# Altium PCB Печтаная плата.PcbDoc
Units mm, origin at the board's own origin, x right, y up, seen from the top; angles counter-clockwise.
Board outline 140 x 100 mm, 4 copper layers ([1]Top, [2]MWGND, [3]Signal, [4]Power), stack 1.271 mm thick; 36 components, 19 nets, 146 pads, 816 vias.
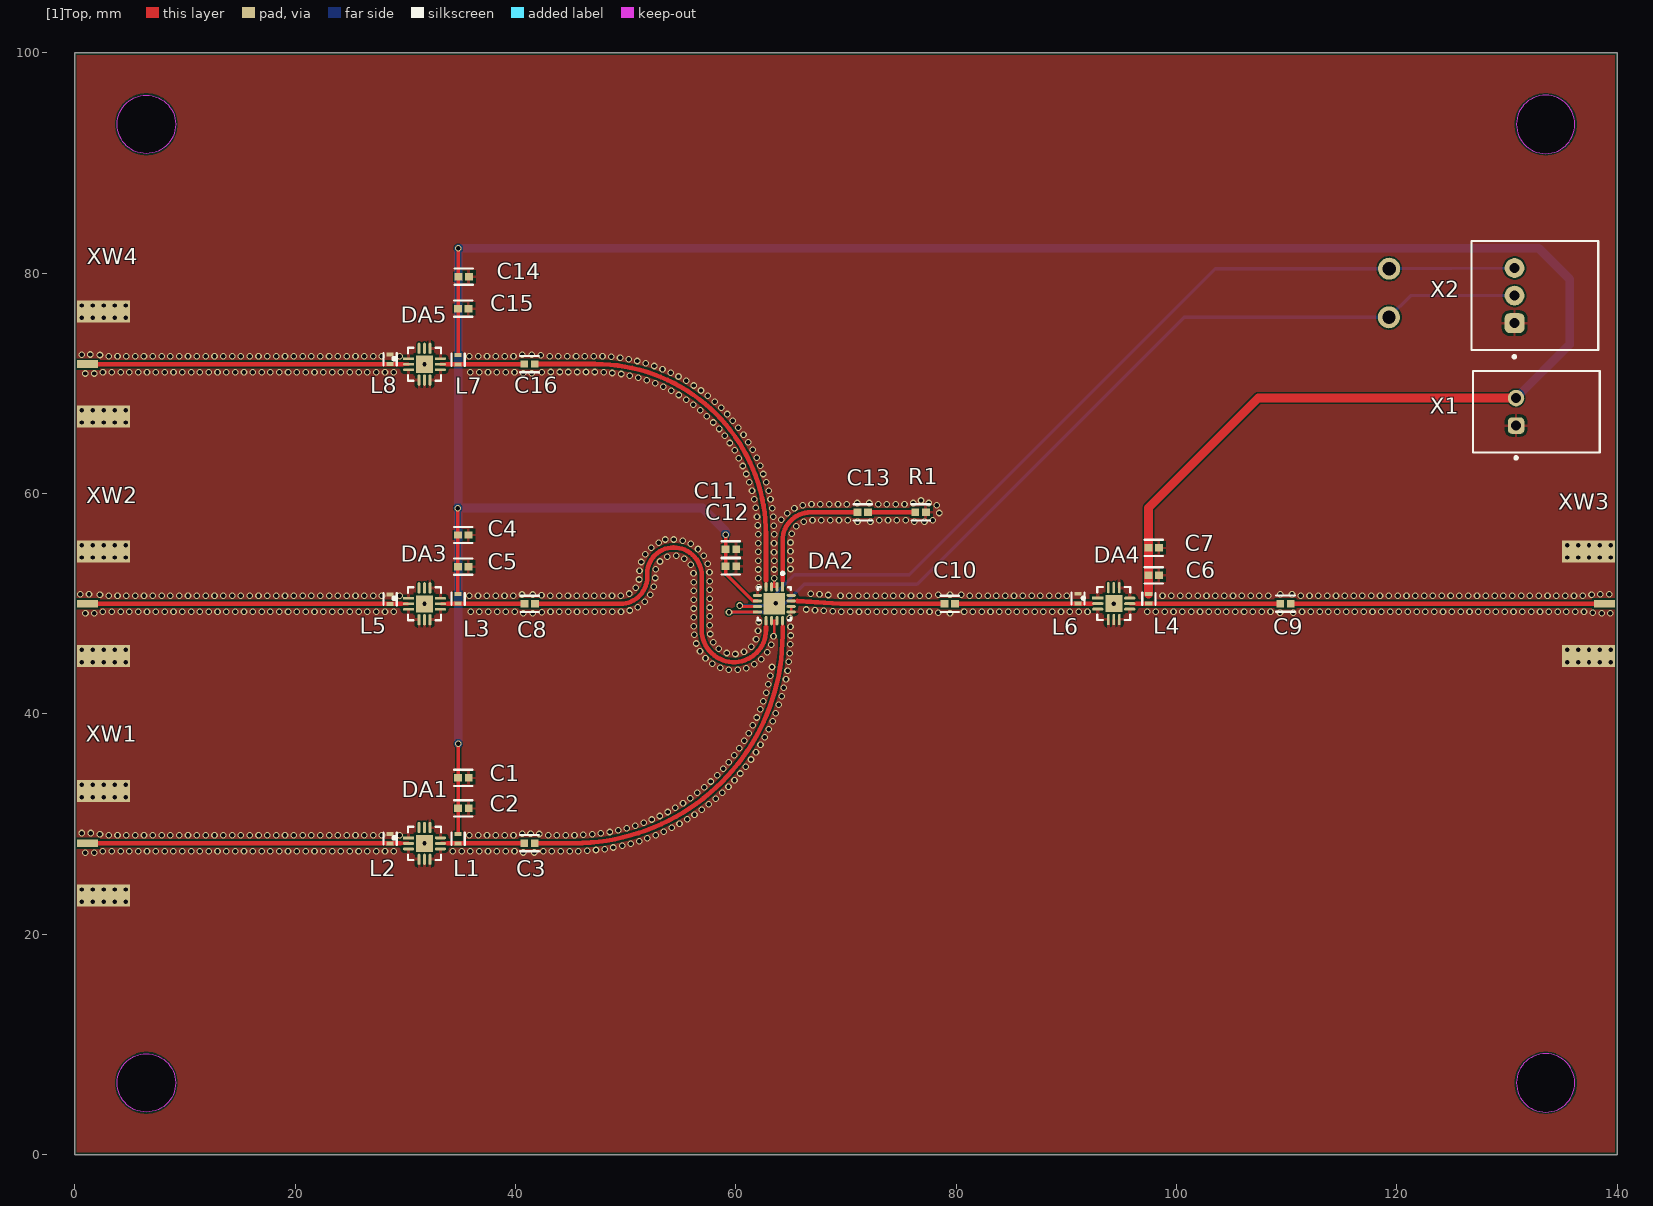
[diagram p0: [1]Top view]
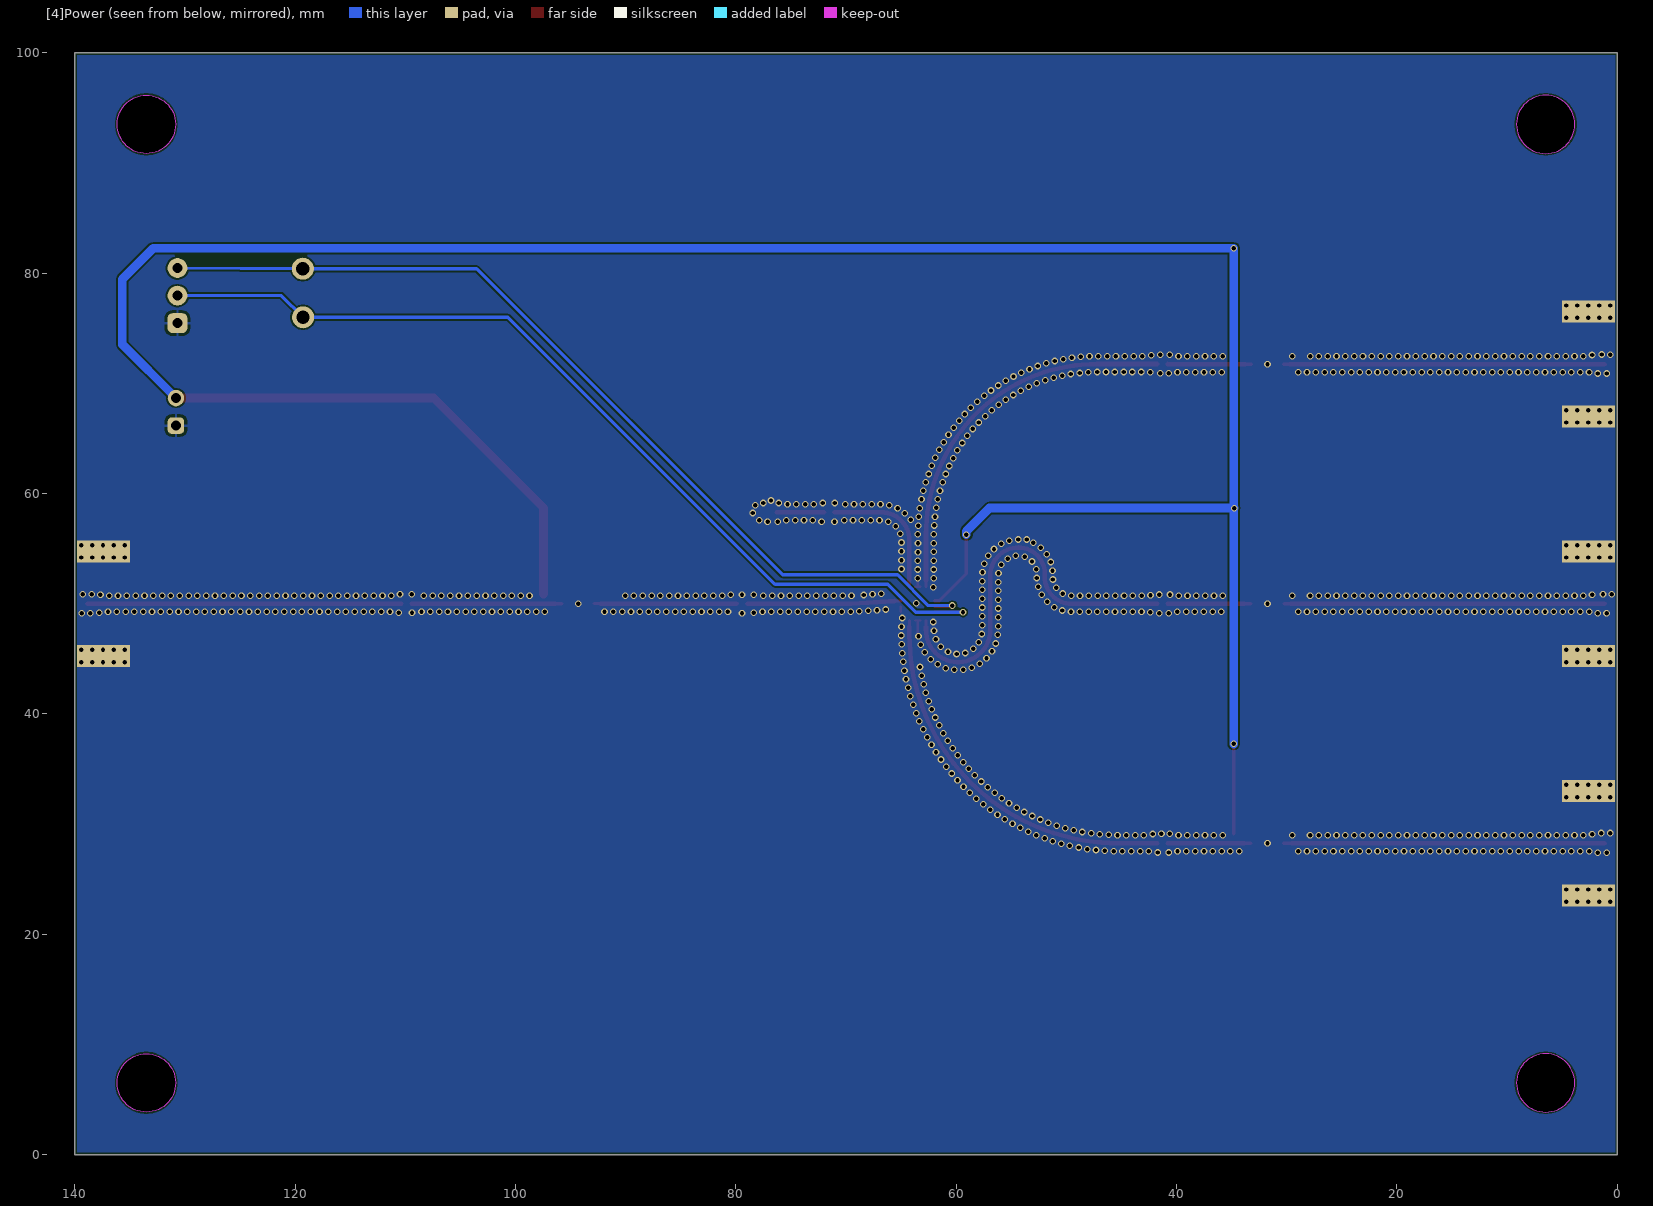
[diagram p1: [4]Power view, seen from below]
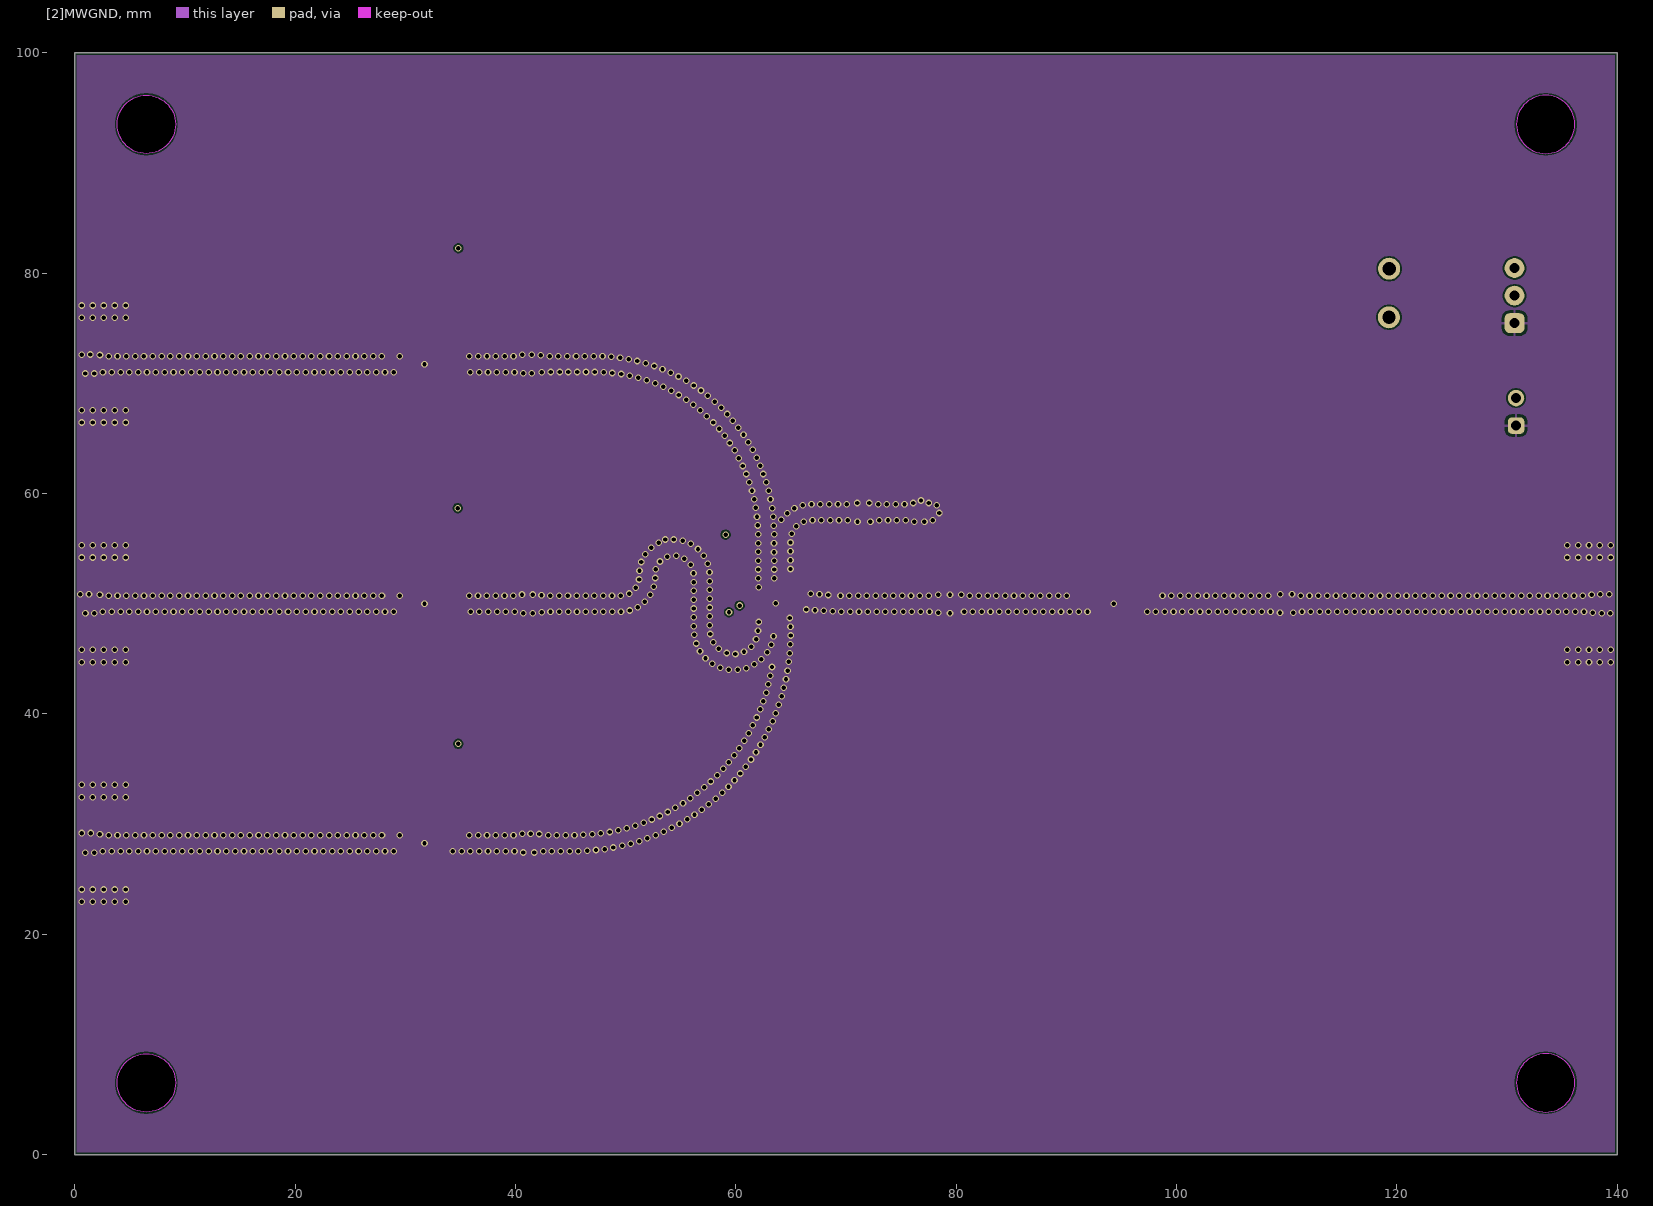
[diagram p2: [2]MWGND]
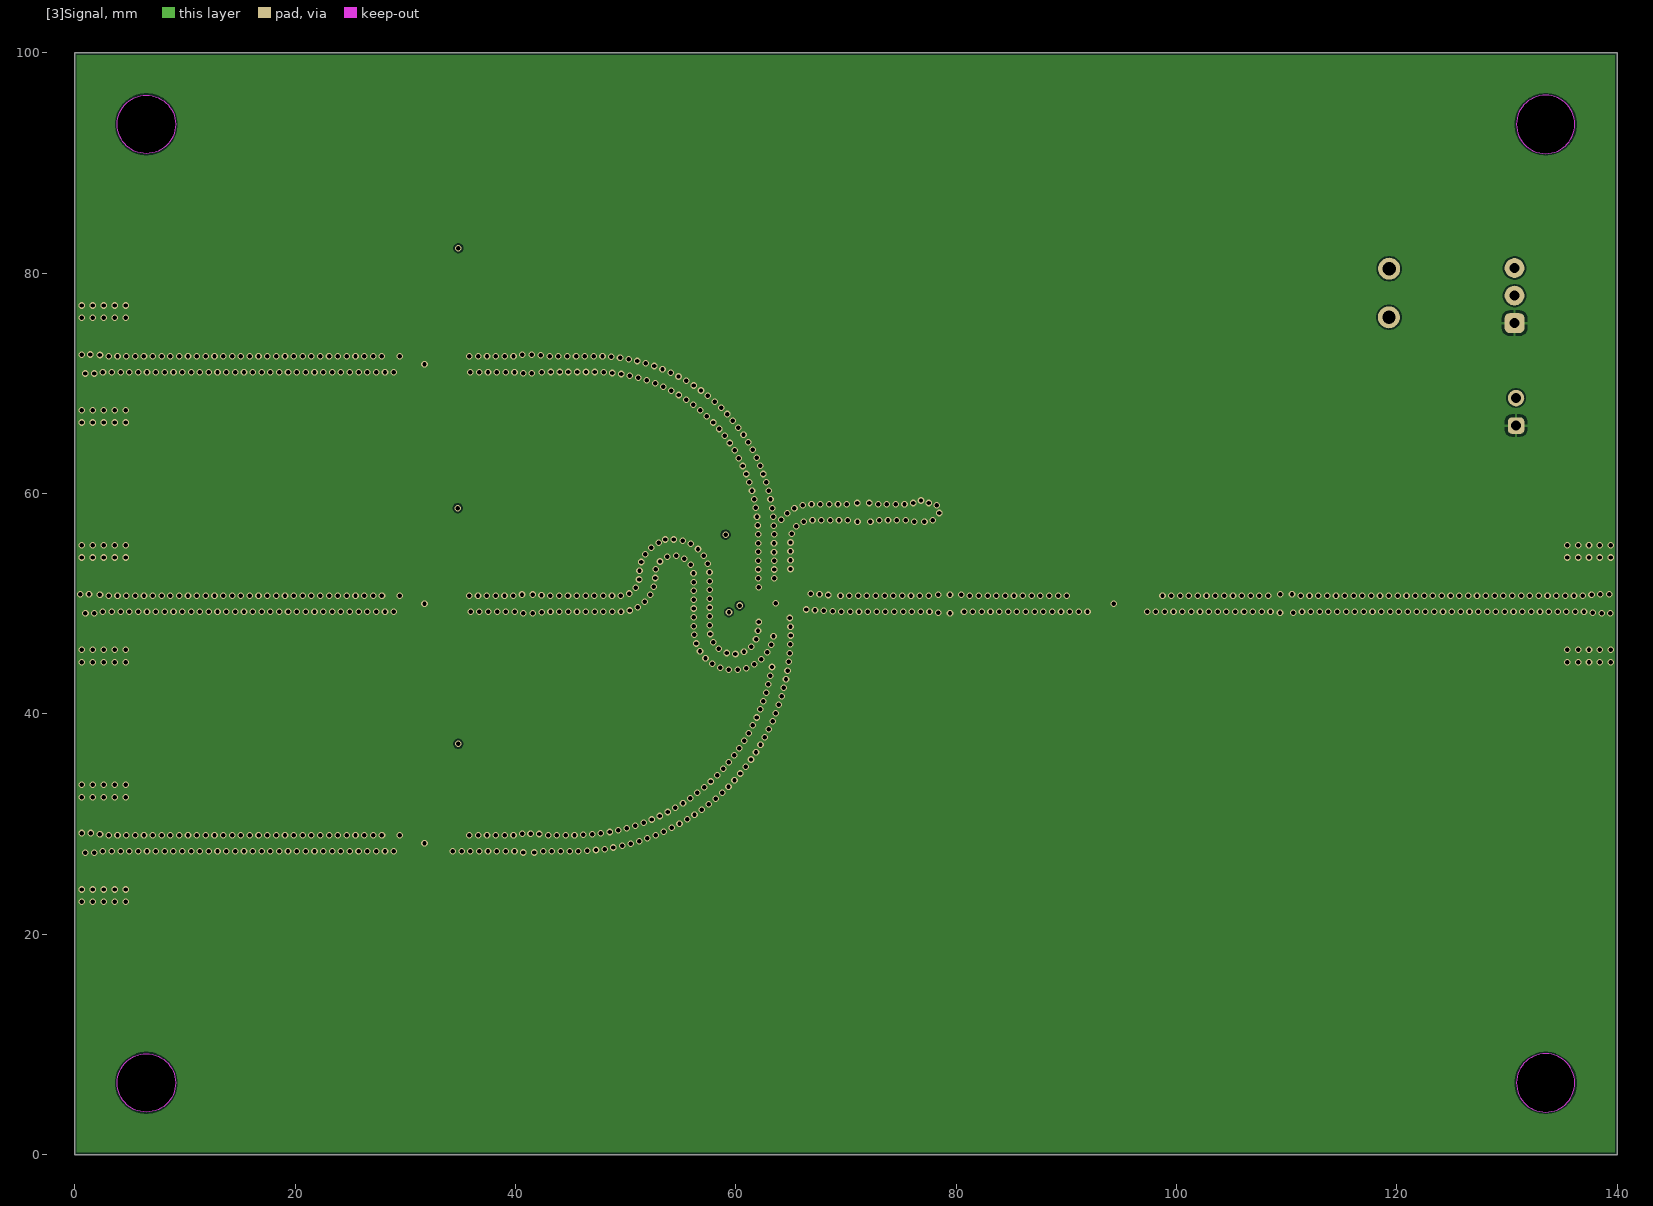
[diagram p3: [3]Signal]
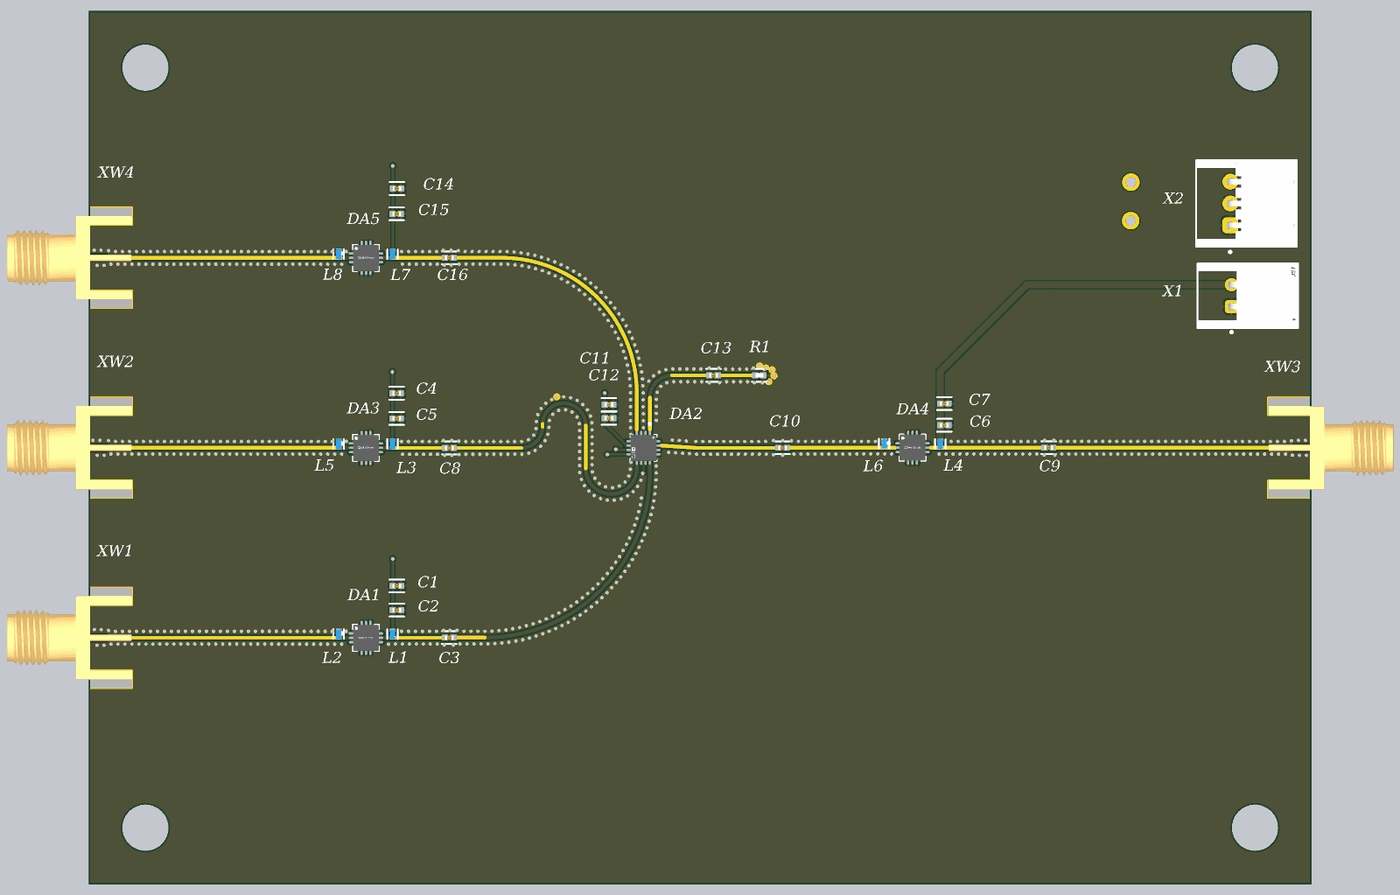
[diagram p4: 3D render of the assembled board from above, using the file's embedded part models]

## Layer stack, top to bottom
Top Solder: solder mask 0.0102, Solder Resist, Dk 3.5
[1]Top: signal copper 0.018
RO4003C: core 0.2032, Core-026, Dk 3.38
[2]MWGND: signal copper 0.018
Dielectric 1: prepreg 0.2083, PP-022, Dk 4.5
[3]Signal: signal copper 0.018
FR-4: core 0.7874, Core-040, Dk 4.6
[4]Power: signal copper 0.018
Bottom Solder: solder mask 0.0102, Solder Resist, Dk 3.5

## Board outline
0.006,0.006 140.006,0.006 140.006,100.006 0.006,100.006
cut-out: 6.506,3.856 cw(c6.506,6.506) 3.856,6.506 cw(c6.506,6.506) 6.506,9.156 cw(c6.506,6.506) 9.156,6.506 cw(c6.506,6.506)
cut-out: 130.856,6.506 ccw(c133.506,6.506) 133.506,3.856 ccw(c133.506,6.506) 136.156,6.506 ccw(c133.506,6.506) 133.506,9.156 ccw(c133.506,6.506)
cut-out: 130.856,93.506 ccw(c133.506,93.506) 133.506,90.856 ccw(c133.506,93.506) 136.156,93.506 ccw(c133.506,93.506) 133.506,96.156 ccw(c133.506,93.506)
cut-out: 6.506,90.856 cw(c6.506,93.506) 3.856,93.506 cw(c6.506,93.506) 6.506,96.156 cw(c6.506,93.506) 9.156,93.506 cw(c6.506,93.506)

## Design rules (kind name [scope] priority, off if disabled: settings)
Clearance CPWG_1 [InNetClass('RF') vs InNet('GND')] p1: gap=0.2 ignorepadtopadclearanceinfootprint=FALSE except(0.15: Arc-SMDPad Track-SMDPad SMDPad-SMDPad)
Clearance [All] p2: gap=0.15 ignorepadtopadclearanceinfootprint=FALSE
MatchedLengths lia_zochem_ti_umer [InNetClass('RF')] p1: tolerance=1 checknetsindiffpair=TRUE checkdiffpairvsdiffpair=FALSE checkxsignals=FALSE checkothers=FALSE
MinimumSolderMaskSliver [All] p1: minsoldermaskwidth=0.15
PolygonConnect RF_COMPONENTS [(HasFootprint('S-P2152-19CQA') OR HasFootprint('FP-0402HP-MFG')) vs InNet('GND')] p1: connectstyle=Direct reliefconductorwidth=0.254 reliefentries=4 polygonreliefangle="90 Angle" airgapwidth=0.15
PolygonConnect [All] p2: thpad.connectstyle=Relief thpad.reliefconductorwidth=0.254 thpad.reliefentries=4 thpad.polygonreliefangle="90 Angle" thpad.airgapwidth=0.254 smdpad.connectstyle=Relief smdpad.reliefconductorwidth=0.254 smdpad.reliefentries=4 smdpad.polygonreliefangle="90 Angle" smdpad.airgapwidth=0.254 via.connectstyle=Direct via.reliefconductorwidth=0.254 via.reliefentries=4 via.polygonreliefangle="90 Angle" via.airgapwidth=0.254
RoutingVias [All] p1: holewidth=0.4 width=0.6 viastyle="Through Hole" minholewidth=0.3 minwidth=0.5 maxholewidth=0.711 maxwidth=1
SolderMaskExpansion CPWG [InNetClass('RF')] p1: expansion=1 istentingtop=FALSE
SolderMaskExpansion [All] p2: expansion=0.102 istentingtop=FALSE
SupplyNets "Schematic Supply Nets_1" [InNet('+5')] p1: voltage=0.000
SupplyNets "Schematic Supply Nets" [InNet('GND')] p2: voltage=0.000
Width micro_strip [InNetClass('RF')] p1: maxlimit=0.5 minlimit=0.254 preferedwidth=0.254 toplayer_minwidth=0.418 toplayer_maxwidth=0.418 toplayer_prefwidth=0.418 impedanceprofiledriven=TRUE impedanceprofileid={426BE0D7-A08D-4F41-A99D-DD10C29EF04F} impedanceprofilevalue=50.000000 minimp=50.000000 maximp=50.000000 favimp=50.000000 checkconnectedcopper=TRUE
Width [All] p2: maxlimit=0.8 minlimit=0.2 preferedwidth=0.3
29 further rules are at their usual default settings.

## Classes and differential pairs
net class RF_SAME: NetC3_1 NetC8_1 NetC16_1
net class RF: NetC3_1 NetC3_2 NetC8_1 NetC8_2 NetC9_1 NetC9_2 NetC10_1 NetC10_2 NetC13_1 NetC13_2 NetC16_1 NetC16_2 NetDA1_2 NetDA3_2 NetDA5_2
component class AMP4: DA4 XW3
component class AMP3: DA5 XW4
component class AMP2: DA3 XW2
component class AMP1: DA1 XW1

## Components (designator, comment, footprint, x,y, rotation, side; value= is the part's Value field where it differs from the comment)
C1 "10pF" FP-GJM155-0_05-IPC_A 35.285,34.186 r0 top
C2 "10nF" FP-GJM155-0_05-IPC_A 35.285,31.417 r0 top
C3 "100 pF" FP-GJM155-0_05-IPC_A 41.279,28.268 r180 top
C4 "10pF" FP-GJM155-0_05-IPC_A 35.259,56.233 r0 top
C5 "10nF" FP-GJM155-0_05-IPC_A 35.259,53.363 r0 top
C6 "10pF" FP-GJM155-0_05-IPC_A 97.942,52.576 r0 top
C7 "10nF" FP-GJM155-0_05-IPC_A 97.942,55.065 r0 top
C8 "100pF" FP-GJM155-0_05-IPC_A 41.296,49.985 r180 top
C9 "100pF" FP-GJM155-0_05-IPC_A 109.894,50.01 r180 top
C10 "100pF" FP-GJM155-0_05-IPC_A 79.426,49.995 r180 top
C11 "10 nF" FP-GJM155-0_05-IPC_A 59.563,54.938 r180 top
C12 "10 pF" FP-GJM155-0_05-IPC_A 59.563,53.388 r180 top
C13 "100pF" FP-GJM155-0_05-IPC_A 71.526,58.291 r180 top
C14 "10pF" FP-GJM155-0_05-IPC_A 35.302,79.677 r0 top
C15 "10nF" FP-GJM155-0_05-IPC_A 35.259,76.782 r0 top
C16 "100pF" FP-GJM155-0_05-IPC_A 41.279,71.753 r180 top
DA1 "PMA3-83LN+" FP-DQ1225-IPC_A 31.751,28.25 r0 top
DA2 "HMC7992" FP-CP-16-38-IPC_A 63.5,50 r270 top
DA3 "PMA3-83LN+" FP-DQ1225-IPC_A 31.751,49.993 r0 top
DA4 "PMA3-83LN+" FP-DQ1225-IPC_A 94.311,50.01 r0 top
DA5 "PMA3-83LN+" FP-DQ1225-IPC_A 31.751,71.735 r0 top
L1 "39 nH" FP-0402HP-MFG 34.798,28.671 r90 top
L2 "18nH" FP-0402HP-MFG 28.626,28.677 r270 top
L3 "39nH" FP-0402HP-MFG 34.798,50.439 r90 top
L4 "39nH" FP-0402HP-MFG 97.485,50.442 r90 top
L5 "18nF" FP-0402HP-MFG 28.626,50.417 r270 top
L6 "18nH" FP-0402HP-MFG 91.059,50.47 r270 top
L7 "39nH" FP-0402HP-MFG 34.798,72.156 r90 top
L8 "18nH" FP-0402HP-MFG 28.626,72.181 r270 top
R1 "100" FP-CR0402-IPC_A 76.775,58.291 r180 top
X1 "JST-2P" FP-S2B-XH-A-1_LF_SN-MFG 132.67,67.415 r270 top
X2 "JST-3P" FP-S3B-XH-A-1_LF_SN-MFG 132.535,77.965 r270 top
XW1 "SMA" S-P2152-19CQA 2.6,33 r180 top
XW2 "SMA" S-P2152-19CQA 2.6,54.75 r180 top
XW3 "SMA" S-P2152-19CQA 137.4,45.25 r0 top
XW4 "SMA" S-P2152-19CQA 2.6,76.5 r180 top

## Footprints (in the part's own frame and the unit in brackets; to place one, negate y for a bottom-side part, rotate by r counter-clockwise, add the part's x,y. Pads: shape width x height; smd on the part's side, far side on the other; paste and mask are expansions set on the pad)
FP-0402HP-MFG [mm]
  rect 0.36x0.66 smd paste+0 mask+0: 1(-0.435,0) 2(0.435,0)
  silkscreen extent -0.56,-0.6 0.55,0.6, body extent -0.71,-0.46 0.71,0.46, height 0.25
FP-CP-16-38-IPC_A [mm]
  rect 0.846x0.242 smd paste+0 mask+0: 1(-1.533,0.75)
  rrect100% 0.846x0.242 smd paste+0 mask+0: 2(-1.533,0.25) 3(-1.533,-0.25) 4(-1.533,-0.75) 9(1.533,-0.75) 10(1.533,-0.25) 11(1.533,0.25) 12(1.533,0.75)
  rrect100% 0.242x0.846 smd paste+0 mask+0: 5(-0.75,-1.533) 6(-0.25,-1.533) 7(0.25,-1.533) 8(0.75,-1.533) 13(0.75,1.533) 14(0.25,1.533) 15(-0.25,1.533) 16(-0.75,1.533)
  rect 1.92x1.92 smd paste-1000 mask+0: 17(0,0)
  silkscreen extent -2.88,-1.5 1.5,1.5, body extent -2.46,-2.46 2.46,2.46, height 0.25
FP-CR0402-IPC_A [mm]
  rect 0.715x0.672 smd paste+0 mask+0: 1(-0.479,0) 2(0.479,0)
  silkscreen extent -0.84,-0.74 0.84,0.74, body extent -1.04,-0.54 1.04,0.54, height 0.25
FP-DQ1225-IPC_A [mm]
  rect 1.019x0.262 smd paste+0 mask+0: 1(-1.447,0.5)
  rrect100% 1.019x0.262 smd paste+0 mask+0: 2(-1.447,0) 3(-1.447,-0.5) 7(1.447,-0.5) 8(1.447,0) 9(1.447,0.5)
  rrect100% 0.262x1.019 smd paste+0 mask+0: 4(-0.5,-1.447) 5(0,-1.447) 6(0.5,-1.447) 10(0.5,1.447) 11(0,1.447) 12(-0.5,1.447)
  rect 1.549x1.549 smd paste-1000 mask+0: 13(0,0)
  silkscreen extent -2.88,-1.5 1.5,1.5, body extent -2.46,-2.46 2.46,2.46, height 0.25
FP-GJM155-0_05-IPC_A [mm]
  rect 0.715x0.672 smd paste+0 mask+0: 1(-0.479,0) 2(0.479,0)
  silkscreen extent -0.84,-0.74 0.84,0.74, body extent -1.04,-0.54 1.04,0.54, height 0.25
FP-S2B-XH-A-1_LF_SN-MFG [mm]
  rrect50% 1.5x1.5 hole 0.9 paste-2539.97 mask+0: 1(1.25,-1.85)
  round 1.5 hole 0.9 paste-2539.97 mask+0: 2(-1.25,-1.85)
  silkscreen extent -3.7,-5.75 4.3,5.75, body extent -3.8,-5.85 3.8,5.85, height 0.25
FP-S3B-XH-A-1_LF_SN-MFG [mm]
  rrect50% 1.8x1.8 hole 0.9 paste-2539.97 mask+0: 1(2.5,-1.85)
  round 1.8 hole 0.9 paste-2539.97 mask+0: 2(0,-1.85) 3(-2.5,-1.85)
  silkscreen extent -4.95,-5.75 5.67,5.75, body extent -5.05,-5.85 5.05,5.85, height 0.25
S-P2152-19CQA [mm]
  rect 1.9x0.7 smd: 1(1.45,4.75)
  rect 4.8x2 smd: 2(0,9.5) 2(0,0)
  rect 4.8x2 smd far side: 2(0,9.5) 2(0,0)
  body extent -2.34,-0.02 11.94,9.51, height 4.8

## Part data
C1 C2 C3 C4 C5 C6 C7 C8 C9 C10 C11 C12 C13 C14 C15 C16: library part C
L1 L2 L3 L4 L5 L6 L7 L8: library part L
R1: library part R
X1 X2: "JST type connector", Net1=GND
  X1: Net2=+5V
  X2: Net2=A, Net3=B
DA1 XW1: ClassName=AMP1
DA3 XW2: ClassName=AMP2
DA4 XW3: ClassName=AMP4
DA5 XW4: ClassName=AMP3

## Free pads (board coordinates)
  round 2 hole 1.2 paste-2539.97 mask+0: MH5(119.305,80.405) MH6(119.28,75.995)

## Via types
v1: diameter 0.6, hole 0.4, [1]Top to [4]Power, 810 vias
v2: diameter 0.6, hole 0.4, [1]Top to [4]Power, tented both sides, 6 vias

## Nets (pads, with @x,y where several pads share a name; then routed paths per layer and width w, separated by ;. In a path a pad name is that pad's centre, name@x,y a point inside that pad or via, vN(x,y) a via of type N, cw(c..) or ccw(c..) an arc to the next point about the centre after c; other vN are vias at no path point)
+5: C1.1 C2.1 C4.1 C5.1 C6.1 C7.1 C11.2 C12.2 C14.1 C15.1 DA2.6 L1.2 L3.2 L4.2 L7.2 X1.2 | length 263.8
  [1]Top w0.3: v2(34.765,58.675) 34.782,58.659 34.782,50.89 L3.2 ; L1.2 34.807,29.115 34.807,37.267 v2(34.815,37.275) ; L7.2 34.811,72.603 34.811,82.247 v2(34.823,82.26) ; v2(59.084,56.268) C12.2 59.084,52.735 61.541,50.279 61.938,50.279 DA2.6 ; C7.1 C7.1@97.475,55.054 ; L4.2@97.475,50.888 L4.2
  [1]Top w0.8: C7.1 97.464,58.709 107.42,68.665 X1.2 ; L4.2@97.475,50.888 C7.1@97.475,55.054
  [4]Power w0.8: v2(34.765,58.675) v2@34.819,58.675 ; v2(34.815,37.275) 34.819,37.279 v2@34.819,58.675 ; v2(59.084,56.268) 59.084,56.581 56.99,58.675 v2@34.819,58.675 ; X1.2 135.695,73.54 135.695,79.445 132.88,82.26 v2(34.823,82.26) 34.819,82.256 v2@34.819,58.675
A: DA2.8 pad.MH6 X2.2 | length 85.8
  [1]Top w0.254: v2(59.385,49.223) 59.407,49.244 61.961,49.244 DA2.8
  [4]Power w0.3: v2(59.385,49.223) 63.679,49.223 66.221,51.765 76.455,51.765 100.685,75.995 pad.MH6 121.25,77.965 X2.2
B: DA2.7 pad.MH5 X2.3 | length 84.6
  [1]Top w0.254: v2(60.35,49.832) 60.444,49.832 60.526,49.75 DA2.7
  [4]Power w0.3: v2(60.35,49.832) 62.534,49.832 65.327,52.625 75.76,52.625 103.54,80.405 pad.MH5 X2.3
GND: C1.2 C2.2 C4.2 C5.2 C6.2 C7.2 C11.1 C12.1 C14.2 C15.2 DA1.1 DA1.3 DA1.4 DA1.5 DA1.6 DA1.7 DA1.9 DA1.10 DA1.13 DA2.2 DA2.3 DA2.5 DA2.10 DA2.11 DA2.13 DA2.14 DA2.16 DA2.17 DA3.1 DA3.3 DA3.4 DA3.5 DA3.6 DA3.7 DA3.9 DA3.10 DA3.13 DA4.1 DA4.3 DA4.4 DA4.5 DA4.6 DA4.7 DA4.9 DA4.10 DA4.13 DA5.1 DA5.3 DA5.4 DA5.5 DA5.6 DA5.7 DA5.9 DA5.10 DA5.13 L2.1 L5.1 L6.1 L8.1 R1.1 X1.1 X2.1 XW1.2 XW2.2 XW3.2 XW4.2 | length 3.7
  [1]Top w0.2: DA2.10 63.5,48.467 ; DA2.3 63.5,51.533 ; v1(63.43,47.058) 63.5,47.128 63.5,48.467 ; v1(63.5,52.304) 63.5,51.533 ; DA2.11 63.5,48.467 ; DA2.2 63.5,51.533 ; DA2.13 DA2.14
  other v1: 0.66,22.946 1.651,22.946 2.642,22.946 3.632,22.946 4.623,22.946 0.66,24.064 1.651,24.064 2.642,24.064 3.632,24.064 4.623,24.064 0.977,27.39 1.777,27.39 40.71,27.422 41.727,27.422 2.565,27.528 3.365,27.528 4.165,27.528 4.965,27.528 5.765,27.528 6.565,27.528 7.365,27.528 8.165,27.528 8.965,27.528 9.765,27.528 10.565,27.528 11.365,27.528 12.165,27.528 12.965,27.528 13.765,27.528 14.565,27.528 15.365,27.528 16.165,27.528 16.965,27.528 17.765,27.528 18.565,27.528 19.365,27.528 20.165,27.528 20.965,27.528 21.765,27.528 22.565,27.528 23.365,27.528 24.165,27.528 24.965,27.528 25.765,27.528 26.565,27.528 27.365,27.528 28.165,27.528 28.965,27.527 34.318,27.527 35.118,27.536 35.918,27.536 36.718,27.536 37.518,27.536 38.318,27.536 39.118,27.536 39.918,27.536 42.517,27.545 43.317,27.545 44.117,27.545 44.917,27.545 45.717,27.55 46.517,27.578 47.314,27.647 48.109,27.732 48.897,27.872 49.682,28.025 50.457,28.223 31.751,28.25 51.225,28.446 51.985,28.698 3.089,28.974 3.889,28.974 4.689,28.974 5.489,28.974 6.289,28.974 7.089,28.974 7.889,28.974 8.689,28.974 9.489,28.974 10.289,28.974 11.089,28.974 11.889,28.974 12.689,28.974 13.489,28.974 14.289,28.974 15.089,28.974 15.889,28.974 16.689,28.974 17.489,28.974 18.289,28.974 19.089,28.974 19.889,28.974 20.689,28.974 21.489,28.974 22.289,28.974 23.089,28.974 23.889,28.974 24.689,28.974 25.489,28.974 26.289,28.974 27.089,28.974 27.889,28.974 29.489,28.973 35.825,28.982 36.625,28.982 37.425,28.982 38.225,28.982 39.025,28.982 39.825,28.982 42.968,28.991 43.768,28.991 44.568,28.991 45.368,28.988 52.73,28.989 46.168,29.017 46.966,29.068 2.295,29.071 40.615,29.114 41.376,29.109 42.176,29.102 47.761,29.154 0.66,29.185 1.448,29.185 48.551,29.283 53.469,29.295 49.336,29.434 50.112,29.632 54.186,29.65 50.879,29.859 54.896,30.018 51.638,30.111 52.379,30.413 55.584,30.427 53.111,30.734 56.259,30.857 53.827,31.092 56.916,31.313 54.524,31.484 57.549,31.801 55.211,31.895 58.172,32.303 55.868,32.351 0.66,32.446 1.651,32.446 2.642,32.446 3.632,32.446 4.623,32.446 56.511,32.827 58.76,32.846 57.134,33.329 59.338,33.399 0.66,33.564 1.651,33.564 2.642,33.564 3.632,33.564 4.623,33.564 57.727,33.866 59.883,33.985 58.305,34.418 60.409,34.587 58.85,35.004 60.911,35.21 59.372,35.611 61.382,35.857 59.874,36.234 61.838,36.514 60.333,36.889 62.249,37.2 60.774,37.556 62.648,37.894 61.182,38.244 63.006,38.609 61.556,38.952 63.342,39.336 61.91,39.669 63.648,40.075 62.216,40.408 63.917,40.828 62.498,41.157 64.17,41.587 62.751,41.916 64.371,42.361 62.958,42.688 64.559,43.139 63.144,43.466 64.701,43.926 59.377,44.005 60.177,43.996 60.96,44.156 58.599,44.191 63.287,44.254 61.688,44.49 57.882,44.546 0.66,44.696 1.651,44.696 2.642,44.696 3.632,44.696 4.623,44.696 135.459,44.696 136.45,44.696 137.44,44.696 138.431,44.696 139.422,44.696 64.819,44.717 62.329,44.968 57.255,45.044 59.973,45.435 59.178,45.525 64.904,45.513 62.847,45.578 60.749,45.631 56.758,45.67 0.66,45.814 1.651,45.814 2.642,45.814 3.632,45.814 4.623,45.814 135.459,45.814 136.45,45.814 137.44,45.814 138.431,45.814 139.422,45.814 58.472,45.902 61.403,46.091 63.217,46.287 64.951,46.312 56.403,46.387 57.947,46.505 61.843,46.759 64.979,47.111 56.217,47.165 57.668,47.255 62.019,47.54 64.973,47.911 56.189,47.965 57.634,48.054 62.077,48.337 64.891,48.707 56.189,48.765 57.634,48.854 0.978,49.14 1.778,49.14 40.728,49.139 41.593,49.139 79.446,49.149 138.582,49.14 139.382,49.14 109.394,49.164 110.6,49.164 137.783,49.164 78.382,49.196 42.389,49.219 43.188,49.262 43.988,49.262 44.788,49.262 45.588,49.262 46.388,49.262 47.188,49.262 47.988,49.262 48.788,49.262 49.588,49.261 2.567,49.277 3.367,49.277 4.167,49.277 4.967,49.277 5.767,49.277 6.567,49.277 7.367,49.277 8.167,49.277 8.967,49.277 9.767,49.277 10.567,49.277 11.367,49.277 12.167,49.277 12.967,49.277 13.767,49.277 14.567,49.277 15.367,49.277 16.167,49.277 16.967,49.277 17.767,49.277 18.567,49.277 19.367,49.277 20.167,49.277 20.967,49.277 21.767,49.277 22.567,49.277 23.367,49.277 24.167,49.277 24.967,49.277 25.767,49.277 26.567,49.277 27.367,49.277 28.167,49.277 28.966,49.284 35.938,49.266 36.738,49.266 37.538,49.266 38.338,49.266 39.138,49.266 39.938,49.266 69.586,49.272 70.386,49.272 71.186,49.272 71.986,49.272 72.786,49.272 73.586,49.272 74.386,49.272 75.186,49.272 75.986,49.272 76.786,49.272 77.586,49.272 80.721,49.288 81.521,49.288 82.321,49.288 83.121,49.288 83.921,49.288 84.721,49.288 85.521,49.288 86.321,49.288 87.121,49.288 87.921,49.288 88.721,49.288 89.521,49.288 90.321,49.288 91.121,49.288 91.921,49.288 97.334,49.283 98.134,49.283 98.934,49.283 99.734,49.283 100.534,49.283 101.334,49.283 102.134,49.283 102.934,49.283 103.734,49.283 104.534,49.283 105.334,49.283 106.134,49.283 106.934,49.283 107.734,49.283 108.534,49.283 111.391,49.282 112.191,49.282 112.991,49.282 113.791,49.282 114.591,49.282 115.391,49.282 116.191,49.282 116.991,49.282 117.791,49.282 118.591,49.282 119.391,49.282 120.191,49.282 120.991,49.282 121.791,49.282 122.591,49.282 123.391,49.282 124.191,49.282 124.991,49.282 125.791,49.282 126.591,49.282 127.391,49.282 128.191,49.282 128.991,49.282 129.791,49.282 130.591,49.282 131.391,49.282 132.191,49.282 132.991,49.282 133.791,49.282 134.591,49.282 135.391,49.282 136.191,49.282 136.991,49.282 68.787,49.316 50.379,49.38 67.988,49.368 67.19,49.42 66.392,49.473 56.189,49.565 57.634,49.654 51.116,49.692 31.751,49.993 94.311,50.006 63.646,50.039 51.753,50.176 56.189,50.365 57.634,50.454 43.17,50.708 43.97,50.708 44.77,50.708 45.57,50.708 46.37,50.708 47.17,50.708 47.97,50.708 48.77,50.708 3.089,50.723 3.889,50.723 4.689,50.723 5.489,50.723 6.289,50.723 7.089,50.723 7.889,50.723 8.689,50.723 9.489,50.723 10.289,50.723 11.089,50.723 11.889,50.723 12.689,50.723 13.489,50.723 14.289,50.723 15.089,50.723 15.889,50.723 16.689,50.723 17.489,50.723 18.289,50.723 19.089,50.723 19.889,50.723 20.689,50.723 21.489,50.723 22.289,50.723 23.089,50.723 23.889,50.723 24.689,50.723 25.489,50.723 26.289,50.723 27.089,50.723 27.889,50.723 29.489,50.73 35.809,50.712 36.609,50.712 37.409,50.712 38.209,50.712 39.009,50.712 39.809,50.712 49.57,50.712 69.507,50.718 70.307,50.718 71.107,50.718 71.907,50.718 72.707,50.718 73.507,50.718 74.307,50.718 75.107,50.718 75.907,50.718 76.706,50.718 77.506,50.718 81.254,50.734 82.054,50.734 82.854,50.734 83.654,50.734 84.454,50.734 85.254,50.734 86.054,50.734 86.854,50.734 87.654,50.734 88.454,50.734 89.254,50.734 90.054,50.734 98.729,50.729 99.529,50.729 100.329,50.729 101.129,50.729 101.929,50.729 102.729,50.729 103.529,50.729 104.329,50.729 105.129,50.729 105.929,50.729 106.729,50.729 107.529,50.729 108.329,50.729 111.276,50.728 112.076,50.728 112.876,50.728 113.676,50.728 114.476,50.728 115.276,50.728 116.076,50.728 116.876,50.728 117.676,50.728 118.476,50.728 119.276,50.728 120.076,50.728 120.876,50.728 121.676,50.728 122.476,50.728 123.276,50.728 124.076,50.728 124.876,50.728 125.676,50.728 126.476,50.728 127.276,50.728 128.076,50.728 128.876,50.728 129.676,50.728 130.476,50.728 131.276,50.728 132.076,50.728 132.876,50.728 133.676,50.728 134.476,50.728 135.276,50.728 136.076,50.728 136.876,50.728 42.372,50.762 52.243,50.808 68.403,50.79 80.457,50.802 137.672,50.799 2.295,50.821 40.6,50.831 41.575,50.831 78.382,50.821 79.446,50.821 0.498,50.86 1.298,50.86 67.605,50.842 109.415,50.856 110.486,50.856 138.47,50.86 139.27,50.86 66.806,50.894 50.342,50.922 56.189,51.165 57.634,51.254 50.941,51.452 62.084,51.506 52.565,51.54 56.189,51.965 57.634,52.054 51.223,52.201 62.027,52.304 52.69,52.331 56.167,52.764 57.616,52.854 51.262,53 62.027,53.104 63.5,53.104 52.749,53.128 64.973,53.153 55.904,53.52 57.449,53.636 51.432,53.782 53.128,53.833 62.027,53.904 63.5,53.904 64.973,53.953 55.342,54.089 0.66,54.196 1.651,54.196 2.642,54.196 3.632,54.196 4.623,54.196 135.459,54.196 136.45,54.196 137.44,54.196 138.431,54.196 139.422,54.196 53.793,54.278 54.589,54.359 57.09,54.351 51.794,54.495 63.473,54.686 62.027,54.704 64.973,54.753 56.572,54.961 52.338,55.082 0.66,55.314 1.651,55.314 2.642,55.314 3.632,55.314 4.623,55.314 135.459,55.314 136.45,55.314 137.44,55.314 138.431,55.314 139.422,55.314 55.923,55.428 62.027,55.504 63.473,55.486 53.007,55.52 64.973,55.553 55.177,55.719 53.598,55.83 54.385,55.83 63.48,56.286 62.029,56.304 65.081,56.345 65.498,57.028 63.449,57.086 61.997,57.103 66.175,57.454 71.048,57.445 72.225,57.445 76.206,57.445 77.127,57.445 66.967,57.568 67.767,57.568 68.567,57.568 69.367,57.568 70.167,57.568 73.016,57.568 73.816,57.568 74.616,57.568 75.416,57.568 77.865,57.568 64.122,57.633 63.391,57.884 61.929,57.9 64.665,58.221 78.455,58.23 63.297,58.678 65.328,58.668 61.826,58.693 66.083,58.932 78.23,58.93 66.879,59.013 67.679,59.013 68.479,59.013 69.279,59.013 70.079,59.013 72.919,59.014 73.719,59.014 74.519,59.014 75.319,59.014 71.026,59.137 72.128,59.137 76.109,59.137 77.508,59.137 76.81,59.37 63.151,59.465 61.67,59.478 61.471,60.253 62.98,60.246 61.239,61.019 62.763,61.016 60.962,61.769 62.506,61.774 60.639,62.501 62.226,62.523 60.284,63.218 61.891,63.25 59.893,63.916 61.529,63.963 59.454,64.585 61.138,64.661 58.986,65.233 60.7,65.33 58.491,65.861 60.24,65.985 0.66,66.446 1.651,66.446 2.642,66.446 3.632,66.446 4.623,66.446 57.948,66.449 59.745,66.613 57.379,67.012 59.216,67.213 56.787,67.55 0.66,67.564 1.651,67.564 2.642,67.564 3.632,67.564 4.623,67.564 58.668,67.796 56.159,68.045 58.08,68.339 55.506,68.507 57.471,68.858 54.833,68.941 54.135,69.332 56.843,69.353 53.415,69.68 56.18,69.801 52.681,69.997 55.503,70.228 51.93,70.274 51.162,70.499 54.805,70.619 50.386,70.69 49.601,70.846 0.978,70.89 1.778,70.89 40.71,70.907 41.499,70.907 48.807,70.942 54.086,70.968 48.009,71.003 2.567,71.02 3.367,71.02 4.167,71.02 4.967,71.02 5.767,71.02 6.567,71.02 7.367,71.02 8.167,71.02 8.967,71.02 9.767,71.02 10.567,71.02 11.367,71.02 12.167,71.02 12.967,71.02 13.767,71.02 14.567,71.02 15.367,71.02 16.167,71.02 16.967,71.02 17.767,71.02 18.567,71.02 19.367,71.02 20.167,71.02 20.967,71.02 21.767,71.02 22.567,71.02 23.367,71.02 24.167,71.02 24.967,71.02 25.767,71.02 26.567,71.02 27.367,71.02 28.167,71.02 28.967,71.012 35.918,71.021 36.718,71.021 37.518,71.021 38.318,71.021 39.118,71.021 39.918,71.021 42.41,71.012 43.21,71.03 44.01,71.03 44.81,71.03 45.61,71.03 46.41,71.03 47.21,71.03 53.355,71.294 52.604,71.571 31.751,71.735 51.842,71.814 51.072,72.031 50.288,72.188 49.499,72.321 48.704,72.415 3.088,72.465 3.888,72.465 4.688,72.465 5.488,72.465 6.288,72.465 7.088,72.465 7.888,72.465 8.688,72.465 9.488,72.465 10.288,72.465 11.088,72.465 11.888,72.465 12.688,72.465 13.488,72.465 14.288,72.465 15.088,72.465 15.888,72.465 16.688,72.465 17.488,72.465 18.288,72.465 19.088,72.465 19.888,72.465 20.688,72.465 21.488,72.465 22.288,72.465 23.088,72.465 23.888,72.465 24.688,72.465 25.488,72.465 26.288,72.465 27.088,72.465 27.888,72.465 29.488,72.458 35.826,72.467 36.626,72.467 37.426,72.467 38.226,72.467 39.026,72.467 39.826,72.467 43.106,72.475 43.906,72.475 44.706,72.475 45.506,72.475 46.306,72.475 47.106,72.475 47.906,72.459 2.295,72.571 42.31,72.56 40.615,72.599 41.499,72.599 0.66,72.61 1.422,72.619 0.66,75.946 1.651,75.946 2.642,75.946 3.632,75.946 4.623,75.946 0.66,77.064 1.651,77.064 2.642,77.064 3.632,77.064 4.623,77.064
NetC3_1: C3.1 DA2.12 | length 34.6
  [1]Top w0.3: 64.25,47.913 DA2.12
  [1]Top w0.418: C3.1 45.353,28.268 ccw(c45.353,47.165) 64.25,47.165 64.25,47.913
NetC3_2: C3.2 DA1.8 L1.1 | length 7.6
  [1]Top w0.3: DA1.8@33.251,28.25 33.804,28.25
  [1]Top w0.418: 33.804,28.25 34.812,28.25 34.821,28.259 40.792,28.259 C3.2
NetC8_1: C8.1 DA2.9 | length 34.6
  [1]Top w0.3: 62.75,47.913 DA2.9
  [1]Top w0.418: C8.1 49.53,49.985 ccw(c49.53,52.423) 51.968,52.423 51.968,52.721 cw(c54.353,52.721) 54.353,55.105 cw(c54.353,52.546) 56.911,52.546 56.911,47.624 ccw(c59.831,47.618) 62.75,47.623 62.75,47.913
NetC8_2: C8.2 DA3.8 L3.1 | length 7.6
  [1]Top w0.3: DA3.8@33.251,49.992 33.804,49.992
  [1]Top w0.418: 33.804,49.992 34.809,49.992 34.813,49.989 40.814,49.989 C8.2
NetC9_1: C9.1 XW3.1 | length 28.5
  [1]Top w0.418: C9.1 110.377,50.005 XW3.1@138.85,50.005
NetC9_2: C9.2 DA4.8 L4.1 | length 13.6
  [1]Top w0.3: DA4.8@95.811,50.006 96.365,50.006
  [1]Top w0.418: 96.365,50.006 109.411,50.006 C9.2
NetC10_1: C10.1 DA4.2 L6.2 | length 13
  [1]Top w0.3: 92.31,50.011 DA4.2
  [1]Top w0.418: C10.1 79.92,50.011 92.31,50.011
NetC10_2: C10.2 DA2.15 | length 13.9
  [1]Top w0.3: DA2.15 65.587,50.25
  [1]Top w0.418: 65.587,50.25 69.482,49.995 C10.2
NetC13_1: C13.1 R1.2 | length 4.3
  [1]Top w0.418: C13.1 R1.2
NetC13_2: C13.2 DA2.1 | length 12.5
  [1]Top w0.3: DA2.1 64.25,52.087
  [1]Top w0.418: 64.25,52.087 64.25,55.751 cw(c66.79,55.751) 66.79,58.291 C13.2
NetC16_1: C16.1 DA2.4 | length 34.6
  [1]Top w0.3: DA2.4 62.75,52.087
  [1]Top w0.418: C16.1 47.254,71.753 47.256,71.753 cw(c47.27,56.273) 62.75,56.273 62.75,52.087
NetC16_2: C16.2 DA5.8 L7.1 | length 7.6
  [1]Top w0.3: DA5.8 33.752,71.735
  [1]Top w0.418: 33.752,71.735 34.812,71.735 34.821,71.744 40.792,71.744 C16.2
NetDA1_2: DA1.2 L2.2 XW1.1 | length 29
  [1]Top w0.3: 29.6,28.25 DA1.2
  [1]Top w0.418: XW1.1 L2.2@28.626,28.251 ; L2.2@28.747,28.25 29.6,28.25
NetDA3_2: DA3.2 L5.2 XW2.1 | length 29.1
  [1]Top w0.3: 29.697,50.007 DA3.2@30.25,50.007
  [1]Top w0.418: XW2.1 28.505,50 28.512,50.007 29.697,50.007
NetDA5_2: DA5.2 L8.2 XW4.1 | length 29.2
  [1]Top w0.3: 29.75,71.735 DA5.2
  [1]Top w0.418: XW4.1 1.157,71.743 28.622,71.743 L8.2 28.88,71.746 28.88,71.743 28.887,71.735 29.75,71.735
pads on no net: DA1.11 DA1.12 DA3.11 DA3.12 DA4.11 DA4.12 DA5.11 DA5.12

## Polygon pours and split planes (outlines as drawn)
GND on [3]Signal "GND_L03_P007" (solid, pour order 7): 0.2,0.2 0.2,99.8 139.8,99.8 139.8,0.2
GND on [1]Top "GND_L01_P002" (solid, pour order 2): 0.2,0.2 0.2,99.8 139.8,99.8 139.8,0.2
GND on [4]Power "GND_L04_P004" (solid, remove dead copper, pour order 4): 0.2,0.2 0.2,99.8 139.8,99.8 139.8,0.2
GND on [2]MWGND "GND_L02_P005" (solid, pour order 5): 0.2,0.2 0.2,99.8 139.8,99.8 139.8,0.2

## Silkscreen, mask and mechanical layers (free items; w line width, h text height)
Mechanical 1:
  lines w0.2: 0,0 63.5,0 63.5,87 ; 1.15,21.75 128.15,21.75 ; 1.15,43.5 128.15,43.5 ; 1.15,65.25 128.15,65.25 ; 25.578,-58.014 25.578,41.986 ; 25.578,43.482 25.578,143.482 ; 31.75,0 31.75,87 ; 37.084,-35.967 37.084,64.033 ; 41.275,21.768 41.275,121.768 ; 101.778,24.486 101.778,42.621
  lines w0.254: 0,0 127,0 127,87 0,87 0,0
Mechanical 2:
  circle w0.013: c133.506,6.506 r2.65
  circle w0.013: c133.506,93.506 r2.65
  circle w0.013: c6.506,6.506 r2.65
  circle w0.013: c6.506,93.506 r2.65
  lines w0.013: 0.006,50.006 140.006,50.006 ; 70.006,0.006 70.006,100.006 ; 0.006,0.006 140.006,0.006 140.006,100.006 0.006,100.006 0.006,0.006